# Altium PCB cmc.PcbDoc
Units mm, origin at the board's own origin, x right, y up, seen from the top; angles counter-clockwise.
Board outline 54 x 34 mm, 2 copper layers (Top Layer, Bottom Layer); 34 components, 37 nets, 160 pads, 37 vias.
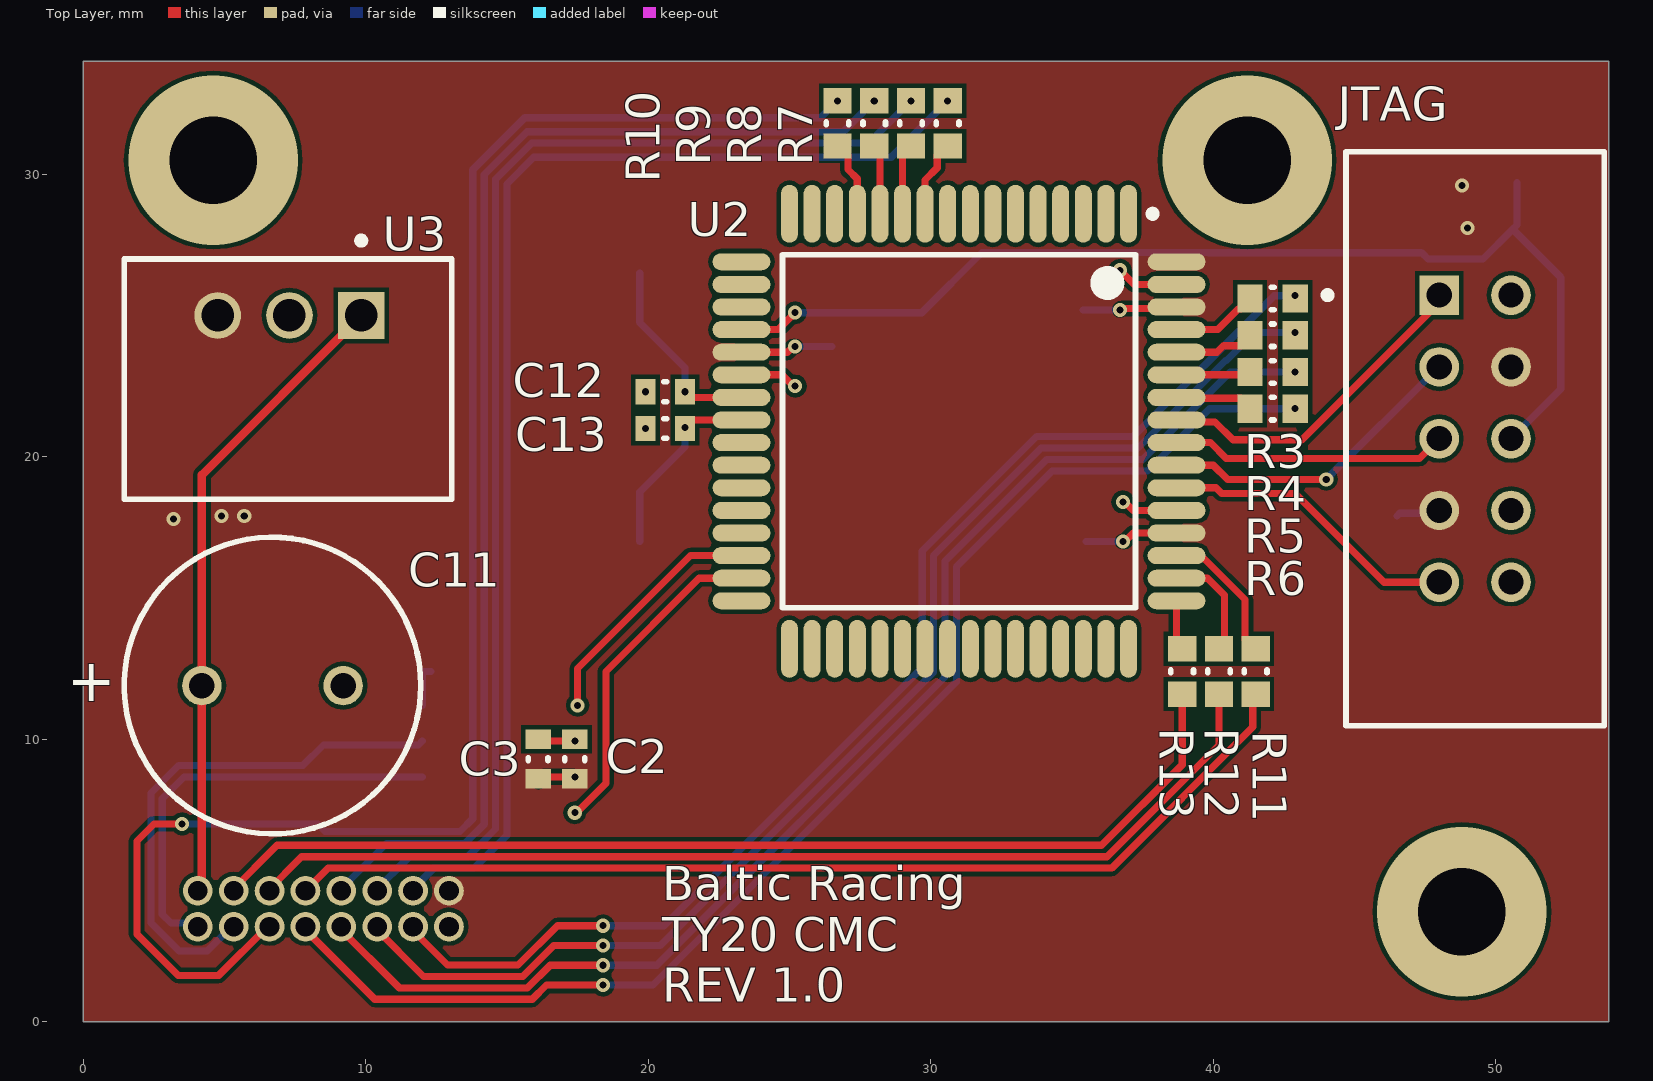
[diagram p0: Top Layer view]
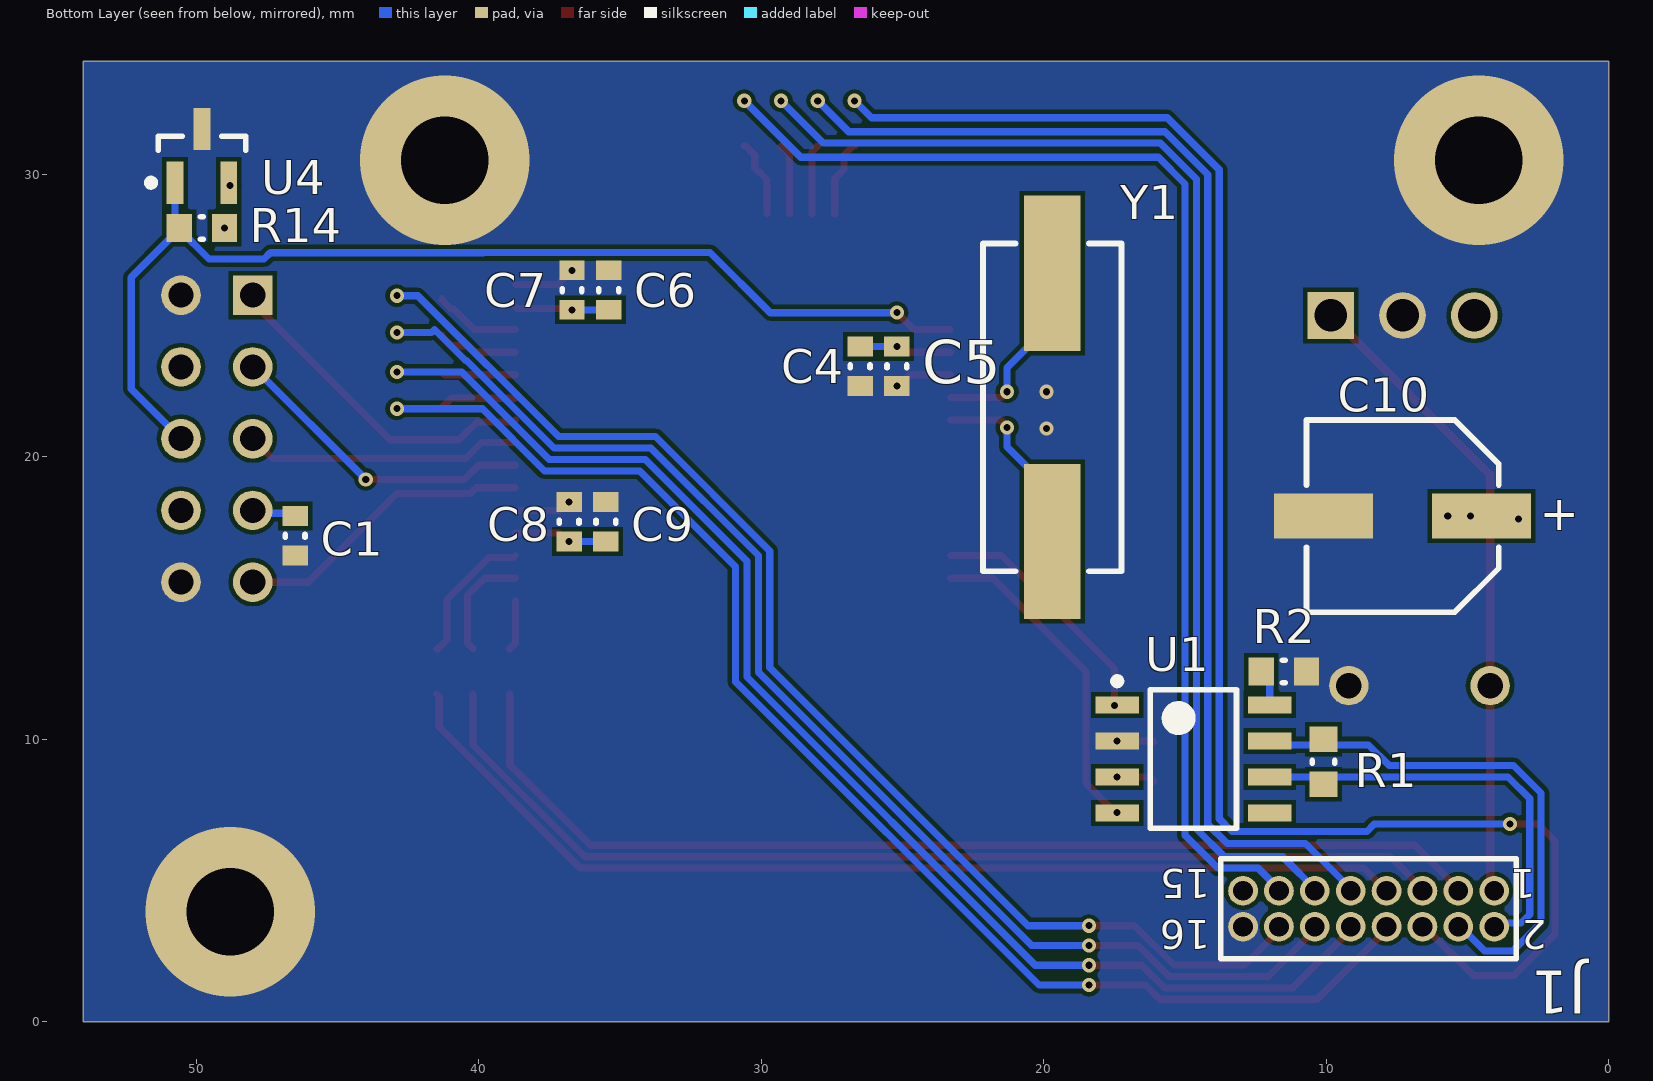
[diagram p1: Bottom Layer view, seen from below]

## Layer stack, top to bottom
Top Solder: solder mask 0.0102, Solder Resist, Dk 3.5
Top Layer: signal copper 0.0356
Dielectric 1: dielectric 0.32, FR-4, Dk 4.8
Bottom Layer: signal copper 0.0356
Bottom Solder: solder mask 0.0102, Solder Resist, Dk 3.5

## Board outline
0,0 0,34 54,34 54,0

## Design rules (kind name [scope] priority, off if disabled: settings)
Clearance [All] p1: gap=0.15 ignorepadtopadclearanceinfootprint=FALSE
PolygonConnect [All] p1: connectstyle=Direct reliefconductorwidth=0.254 reliefentries=4 polygonreliefangle="90 Angle" airgapwidth=0.254
RoutingVias [All] p1: holewidth=0.711 width=1.27 viastyle="Through Hole" minholewidth=0.711 minwidth=1.27 maxholewidth=0.711 maxwidth=1.27
SolderMaskExpansion [All] p1: expansion=0.102 istentingtop=FALSE
Width [All] p1: maxlimit=0.5 minlimit=0.254 preferedwidth=0.254
30 further rules are at their usual default settings.

## Components (designator, comment, footprint, x,y, rotation, side; value= is the part's Value field where it differs from the comment)
C1 "100nF 0603" CAPC0603(1608)100_L 46.5,17.2 r270 bottom value=100nF
C2 "100nF 0603" CAPC0603(1608)100_L 17.4,9.3 r90 top value=100nF
C3 "1µF 0603" CAPC0603(1608)100_L 16.1,9.3 r90 top value=100nF
C4 "100nF 0603" CAPC0603(1608)100_L 26.5,23.2 r90 bottom value=100nF
C5 "1µF 0603" CAPC0603(1608)100_L 25.2,23.2 r90 bottom value=100nF
C6 "100nF 0603" CAPC0603(1608)100_L 35.4,25.9 r270 bottom value=100nF
C7 "1µF 0603" CAPC0603(1608)100_L 36.7,25.9 r270 bottom value=100nF
C8 "100nF 0603" CAPC0603(1608)100_L 36.8,17.7 r270 bottom value=100nF
C9 "1µF 0603" CAPC0603(1608)100_L 35.5,17.7 r270 bottom value=100nF
C10 "100uF, 10V" WCAP-ASLU_6.3x7.7 7.3,17.9 r180 bottom
C11 "220uF, 25V" WCAP-ATET_10x12.5 6.7,11.9 r180 top
C12 "16 pF 0603" CAPC0603(1608)100_L 20.6,22.3 r180 top value=100nF
C13 "16 pF 0603" CAPC0603(1608)100_L 20.6,21 r180 top value=100nF
J1 "62201621121" 62201621121 8.5,4 r0 bottom
JTAG "5103309-1" TECO-5103309-1_V 49.27,20.64 r90 top (schematic designator P?)
R1 "127R 0603" RESC0603(1608)_N 10.1,9.2 r90 bottom value="127.00 Ohm"
R2 "10k 0603" RESC0603(1608)_N 11.5,12.4 r0 bottom value="127.00 Ohm"
R3 "10k 0603" RESC0603(1608)_N 42.1,25.6 r180 top value="127.00 Ohm"
R4 "10k 0603" RESC0603(1608)_N 42.1,24.3 r180 top value="127.00 Ohm"
R5 "10k 0603" RESC0603(1608)_N 42.1,23 r180 top value="127.00 Ohm"
R6 "10k 0603" RESC0603(1608)_N 42.1,21.7 r180 top value="127.00 Ohm"
R7 "10k 0603" RESC0603(1608)_N 30.6,31.8 r90 top value="127.00 Ohm"
R8 "10k 0603" RESC0603(1608)_N 29.3,31.8 r90 top value="127.00 Ohm"
R9 "10k 0603" RESC0603(1608)_N 28,31.8 r90 top value="127.00 Ohm"
R10 "10k 0603" RESC0603(1608)_N 26.7,31.8 r90 top value="127.00 Ohm"
R11 "10k 0603" RESC0603(1608)_N 41.5,12.4 r90 top value="127.00 Ohm"
R12 "10k 0603" RESC0603(1608)_N 40.2,12.4 r90 top value="127.00 Ohm"
R13 "10k 0603" RESC0603(1608)_N 38.9,12.4 r90 top value="127.00 Ohm"
R14 "10k 0603" RESC0603(1608)_N 49.8,28.1 r0 bottom value="127.00 Ohm"
U1 "MCP2551-I/SN" MCHP-SN8_V 14.7,9.3 r180 bottom
U2 "AT90CAN128-16AU" 64A_M 31,20.9 r270 top
U3 "R-78E5.0-0.5" REPO-R-78E-0.5-3_V 7.3,25 r180 top
U4 "MCP120T-300I/TT" SOT-23-TT3_N 49.8,30.65 r90 bottom
Y1 "16MHz, +/-30ppm, 16pF" WE-XTAL_HC49/4HSMX 19.7,21.75 r90 bottom

## Footprints (in the part's own frame and the unit in brackets; to place one, negate y for a bottom-side part, rotate by r counter-clockwise, add the part's x,y. Pads: shape width x height; smd on the part's side, far side on the other; paste and mask are expansions set on the pad)
64A_M [mm] "Thin QFP, 64-Leads, Body 14x14mm, Pitch 0.8mm, IPC Low Density"
  oval 2.05x0.6 smd: 1(-7.7,6) 2(-7.7,5.2) 3(-7.7,4.4) 4(-7.7,3.6) 5(-7.7,2.8) 6(-7.7,2) 7(-7.7,1.2) 8(-7.7,0.4) 9(-7.7,-0.4) 10(-7.7,-1.2) 11(-7.7,-2) 12(-7.7,-2.8) 13(-7.7,-3.6) 14(-7.7,-4.4) 15(-7.7,-5.2) 16(-7.7,-6) 33(7.7,-6) 34(7.7,-5.2) 35(7.7,-4.4) 36(7.7,-3.6) 37(7.7,-2.8) 38(7.7,-2) 39(7.7,-1.2) 40(7.7,-0.4) 41(7.7,0.4) 42(7.7,1.2) 43(7.7,2) 44(7.7,2.8) 45(7.7,3.6) 46(7.7,4.4) 47(7.7,5.2) 48(7.7,6)
  oval 0.6x2.05 smd: 17(-6,-7.7) 18(-5.2,-7.7) 19(-4.4,-7.7) 20(-3.6,-7.7) 21(-2.8,-7.7) 22(-2,-7.7) 23(-1.2,-7.7) 24(-0.4,-7.7) 25(0.4,-7.7) 26(1.2,-7.7) 27(2,-7.7) 28(2.8,-7.7) 29(3.6,-7.7) 30(4.4,-7.7) 31(5.2,-7.7) 32(6,-7.7) 49(6,7.7) 50(5.2,7.7) 51(4.4,7.7) 52(3.6,7.7) 53(2.8,7.7) 54(2,7.7) 55(1.2,7.7) 56(0.4,7.7) 57(-0.4,7.7) 58(-1.2,7.7) 59(-2,7.7) 60(-2.8,7.7) 61(-3.6,7.7) 62(-4.4,7.7) 63(-5.2,7.7) 64(-6,7.7)
  silkscreen extent -7.82,-6.25 6.25,6.98, body extent -7,-7 7,7, height 1.6
62201621121 [mm] "Pin Header, pitch 1.27 mm, THT, Vertical, dual row, 16p"
  round 1.05 hole 0.7: 1(-4.445,-0.635) 2(-4.445,0.635) 3(-3.175,-0.635) 4(-3.175,0.635) 5(-1.905,-0.635) 6(-1.905,0.635) 7(-0.635,-0.635) 8(-0.635,0.635) 9(0.635,-0.635) 10(0.635,0.635) 11(1.905,-0.635) 12(1.905,0.635) 13(3.175,-0.635) 14(3.175,0.635) 15(4.445,-0.635) 16(4.445,0.635)
  silkscreen extent -5.23,-1.78 5.23,1.77, body extent -5.08,-1.7 5.08,1.7, height 5.33
CAPC0603(1608)100_L [mm] "Chip Capacitor, Body 1.6x0.8mm, Height 1.0mm, IPC High Density"
  rect 0.7x0.9 smd: 1(-0.7,0) 2(0.7,0)
  silkscreen extent -0.05,-0.35 0.05,0.35, body extent -0.87,-0.47 0.88,0.48, height 1
MCHP-SN8_V [mm] "SOIC, 8-Leads, Body 4.9x3.9mm, Pitch 1.27mm"
  rect 1.55x0.6 smd: 1(-2.7,1.905) 2(-2.7,0.635) 3(-2.7,-0.635) 4(-2.7,-1.905) 5(2.7,-1.905) 6(2.7,-0.635) 7(2.7,0.635) 8(2.7,1.905)
  silkscreen extent -2.83,-2.45 1.53,2.88, body extent -3,-2.45 3,2.45, height 1.75
REPO-R-78E-0.5-3_V [mm] "THD, 3-Leads, Body 11.6x8.5mm, Pitch 2.54mm"
  rect 1.65x1.65 hole 1.15: 1(-2.54,0)
  round 1.65 hole 1.15: 2(0,0) 3(2.54,0)
  silkscreen extent -5.75,-2.77 5.85,6.5, body extent -5.75,-2 5.85,6.5, height 10.4
RESC0603(1608)_N [mm] "Chip Resistor, Body 1.6x0.8mm, IPC Medium Density"
  rect 0.9x1 smd: 1(-0.8,0) 2(0.8,0)
  silkscreen extent -0.05,-0.4 0.05,0.4, body extent -0.85,-0.47 0.85,0.47, height 0.6
SOT-23-TT3_N [mm] "SOT23, 3-Leads, Body 2.9x1.3mm, Pitch 0.95mm, Lead Span 2.4mm, IPC Medium Density"
  rect 1.5x0.6 smd: 1(-0.95,0.95) 2(-0.95,-0.95) 3(0.95,0)
  silkscreen extent -1.07,-1.55 0.7,1.93, body extent -0.7,-1.52 0.7,1.53, height 1.12
TECO-5103309-1_V [mm] "Male Header, 10-Leads, Body 20.32x9.144mm, Pitch 2.54mm"
  rect 1.4x1.4 hole 0.889: 1(5.08,1.27)
  round 1.4 hole 0.889: 2(5.08,-1.27) 3(2.54,1.27) 4(2.54,-1.27) 5(0,1.27) 6(0,-1.27) 7(-2.54,1.27) 8(-2.54,-1.27) 9(-5.08,1.27) 10(-5.08,-1.27)
  silkscreen extent -10.16,-4.57 10.16,5.35, body extent -10.16,-4.57 10.16,4.57, height 9.85
WCAP-ASLU_6.3x7.7 [mm] "Aluminum Electrolytic Capacitors, body diameter 6.3mm"
  rect 3.5x1.6 smd: 1(-2.8,0) 2(2.8,0)
  silkscreen extent -3.4,-3.4 3.4,3.4, body extent -3.65,-3.3 3.65,3.3, height 7.7
WCAP-ATET_10x12.5 [mm] "Aluminum Electrolytic Capacitors, 10x12.5mm"
  round 1.4 hole 0.9: 1(-2.5,0) 2(2.5,0)
  silkscreen extent -5.25,-5.25 5.25,5.25, body extent -4.99,-5 5,5, height 12.76
WE-XTAL_HC49/4HSMX [mm] "Quartz Crystal, size HC49/4HSMX, body 11.4x4.9mm"
  rect 5.5x2 smd: 1(-4.75,0) 2(4.75,0)
  silkscreen extent -5.8,-2.45 5.8,2.45, body extent -6.7,-2.45 6.7,2.45, height 4.3

## Part data
C1 C2 C3 C4 C5 C6 C7 C8 C9 C12 C13: library part CMP-1035-02579-1, "CAP 100nF 10V ±5% 0603 (1608 Metric) Thickness 1mm SMD", Case-EIA=0603, Case-Metric=1608, Rated Voltage="10 V", Tolerance=Â±5%, Max Thickness="1 mm", Technology=SMT
C10: library part 865090245005, "WCAP-ASLU Aluminium Electrolytic Capacitors, D6.3mm x L7.7mm, 100uF, +/-20%, 10VDC", Capacitance=100uF, Capacitance Tolerance=+/-20%, Leakage Current=2uA, Operating Temperature="-40 to +85degC", Rated Voltage=10VDC, Ripple Current max.=75mA, ComponentLink1Description=Manufacturer, ComponentLink1URL=http://www.we-online.de, ComponentLink2Description=Datasheet, ComponentLink2URL=https://katalog.we-online.com/pbs/datasheet/865090245005.pdf, Diameter=6.3mm, Dissipation Factor=22%, Endurance=1000h, Length=7.7mm, Mounting Technology=SMD, Packaging="Tape and Reel", Part Number=865090245005, Published Date="August 2019", Publisher="Wurth Elektronik", Technical Reference=ASBD077101M010DVCTCA000
C11: library part 860130475006, "WCAP-ATET THT Aluminum Electrolytic Capacitors, D10mm x L12.5mm, 220uF, +/-20%, 25VDC", Capacitance=220uF, Capacitance Tolerance=+/-20%, Leakage Current=55uA, Operating Temperature="-40 to +125degC", Rated Voltage=25VDC, Ripple Current max.=420mA, ComponentLink1Description=Manufacturer, ComponentLink1URL=http://www.we-online.de, ComponentLink2Description=Datasheet, ComponentLink2URL=https://katalog.we-online.com/pbs/datasheet/860130475006.pdf, Diameter=10mm, Dissipation Factor=13%, Endurance=2000h, Length=12.5mm, Mounting Technology=THT, Packaging="Ammo Pack", Part Number=860130475006, Published Date="August 2019", Publisher="Wurth Elektronik", Technical Reference=ATGF125221M025DSPA9B000
J1: library part CMP-1502-00950-1, "THT Vertical Pin Header WR-PHD, Pitch 1.27 mm, Dual Row, 16 pins", Contact Resistance=20mOhm, Manufacturer="Wurth Elektronik", Operating Temperature=-40to105degC, Rated Current=1A, Withstanding Voltage=500VAC, Working Voltage=100VAC, Datasheet URL=https://katalog.we-online.de/em/datasheet/62201621121.pdf, Gender=Male, Manufacturer URL=http://www.we-online.de, Mounting Technology=THT, Orientation=Vertical, Package Reference=62201621121, Packaging=Box, Part Number=62201621121, Pin Number=16, Pitch=1.27mm, Publisher=WurthElektronik, Row Number=Dual
JTAG: library part CMP-2000-07502-1, "Male Header, Pitch 2.54 mm, 2 x 5 Position, Height 9.855 mm, Tail Length 3.048 mm, -65 to 105 degC, RoHS, Tube", Colour=Black, Current Rating=1A, Flammability Rating=UL94V-0, Insulation Resistance=5GR, Manufacturer="TE Connectivity", Max Operating Temperature=105degC, Min Operating Temperature=-65degC, Package Description="Male Header, Pitch 2.54 mm, 2 x 5 Position, Height 9.855 mm, Tail Length 3.048 mm", Package Quantity=35, Board Standoff=Yes(With), Body Material=Thermoplastic, Connector System=Wire-to-Board, Connector Type=Header, Contact Gender=Male, Contact Material=CopperAlloy, Contact Mating Length=0.24inch, Contact Plating=Gold, Contact Shape=Square, Datasheet URL=http://www.te.com/commerce/DocumentDelivery/DDEController?Action=showdoc&DocId=Customer+Drawing%7F5103309%7FE1%7Fpdf%7FEnglish%7FENG_CD_5103309_E1.pdf%7F5103309-1, Datasheet Version="Rev. E1, 03/2011", Depth=9.14mm, ELV=Compliant, Gender=Male, Height=8.813mm, Housing Colour=Black, Housing Material=PBT, Lead Free=LeadFree, Length=0.8inch, Manufacturer URL=http://www.te.com/, Mating Alignment=Yes(With), Mating Connector Lock=No(Without), Mating Retention=No(Without), Max Current Rating=1A, Mount=ThroughHole, Mounting Technology=ThroughHole, Number of Contacts=10, Number of Positions=10, Number of Rows=2, Orientation=Straight, Package Reference=5103309-1, Packaging=Rail/Tube, Panel Mount Retention=No(Without), PCB Mount Alignment=No(Without), PCB Mounting Orientation=Vertical, PCB Mount Retention=Without, Pitch=2.54mm, REACH SVHC=NoSVHC, RoHSCompliant=True, Row Spacing=2.54mm, Shrouded=Yes(With), Shrouded End Dimension=3.81mm, Termination=ThroughHole, Termination Post Length=0.12inch
R1 R2 R3 R4 R5 R6 R7 R8 R9 R10 R11 R12 R13 R14: library part CMP-1012-00408-1, "127R 0.1W 1% 0603 (1608 Metric)  SMD", Case-EIA=0603, Case-Metric=1608, Power="0.1 W", Tolerance="1 %", Technology=SMT
U1: library part CMP-1721-00003-1, "High-Speed CAN Transceiver, /  1 Mb/s, 4.5 to 5.5 V, 8-Pin SOIC (SN), Industrial Temperature, RoHS, Tube", Manufacturer=Microchip, ComponentLink1Description="Manufacturer URL", ComponentLink1URL=http://www.microchip.com/, ComponentLink2Description=Datasheet, ComponentLink2URL=http://ww1.microchip.com/downloads/en/DeviceDoc/21667f.pdf, ComponentLink3Description="Package Specification", ComponentLink3URL=http://www.microchip.com/stellent/groups/techpub_sg/documents/packagingspec/en012702.pdf, DatasheetVersion="Rev. F, 07/2010", Mounting Technology="Surface Mount", PackageDescription="8-Pin Small Outline Integrated Circuit, Body 4.9 x 3.9 mm, Pitch 1.27 mm", PackageReference=SN8, RoHSCompliant=true
U2: library part CMP-0096-00104-1, "8-bit AVR Microcontroller, 128KB Flash and CAN Controller, 53 GPIO pins, Industrial Grade (-40° to +85°C), 64-pin LQFP, Green", Code_JEDEC=MS-026-AEB, DatasheetVersion="revH, Aug-2008", PackageDescription="64-Pin Plastic Thin Profile Quad Flat Pack, 14 x 14 x 1.0 mm Body, 0.8 mm Pitch (TQFP)", PackageReference=64A, PackageVersion="revB, Oct-2001"
U3: library part CMP-2000-06922-2, "DC/DC-Converter, 5 V Single Output, 500 mA, -40 to 85 degC, 3-Pin THD, RoHS, Tube", Current - Output (Max)=500mA, Manufacturer="Recom Power", Operating Temperature=-40°C~85°C, Package Description="3-Pin Through Hole Device, Body 11.6 x 8.5 mm, Pitch 2.54 mm", Package Reference="SIP Module", Package Version="Rev. 0", Datasheet URL=http://www.recom-power.com/pdf/Innoline/R-78Exx-0.5.pdf, Datasheet Version=01/2017, Efficiency=92%, Manufacturer URL=http://www.recom-power.com/us/americas/home.html, Mounting Technology=ThroughHole, Number of Outputs=1, Packaging=Tube, VIN Max=28V, VIN Min=7V, VOUT=5V
U4: library part CMP-0138-00362-1, "Microcontroller Supervisory Circuit with Open Drain Output, 3-Pin SOT-23, Industrial Temperature, Tape and Reel", Code_IPC=SOT23-3, DatasheetVersion="revD, 2001", PackageDescription="3-Lead Plastic Small Outline Transistor (TT) [SOT-23]", PackageReference=SOT-23-TT3, PackageVersion="revBB, Aug-2009"
Y1: library part 830003237, "WE-XTAL Quartz Crystal, size HC49-4HSMX, 16MHz, +/-30ppm, 16pF", Frequency=16MHz, Frequency Stability=50ppm, Frequency Tolerance=+/-30ppm, Load Capacitance=16pF, Operating Temperature="-10 up to +60degC", ComponentLink1Description=Manufacturer, ComponentLink1URL=http://www.we-online.de, ComponentLink2Description=Datasheet, ComponentLink2URL=https://katalog.we-online.com/pbs/datasheet/830003237.pdf, Mounting Technology=SMT, Packaging="Tape and Reel", Part Number=830003237, Published Date="March 2019", Publisher="Wurth Elektronik", Size=HC49-4HSMX

## Via types
v1: diameter 0.5, hole 0.25, Top Layer to Bottom Layer, 34 vias
v2: diameter 6, hole 3.1, Top Layer to Bottom Layer, 3 vias

## Nets (pads, with @x,y where several pads share a name; then routed paths per layer and width w, separated by ;. In a path a pad name is that pad's centre, name@x,y a point inside that pad or via, vN(x,y) a via of type N, cw(c..) or ccw(c..) an arc to the next point about the centre after c; other vN are vias at no path point)
12V: C11.2 J1.1 U3.1 | length 22.8
  Top Layer w0.254: J1.1@3.96,4.613 J1.1@4.2,4.852
  Top Layer w0.3: J1.1@4.2,4.852 C11.2 4.2,19.36 U3.1
Analog_in1: J1.14 R3.1 | length 44.1
  Top Layer w0.254: J1.14@11.58,3.343 11.58,3.32 12.892,2.008 15.394,2.008 16.786,3.4 v1(18.4,3.4)
  Bottom Layer w0.254: v1(18.4,3.4) 20.557,3.4 29.696,12.539 29.696,16.667 33.741,20.712 37.169,20.712 42.157,25.7 v1(42.9,25.7)
Analog_in2: J1.12 R4.1 | length 45.3
  Top Layer w0.254: J1.12@10.31,3.343 12.049,1.604 15.561,1.604 16.657,2.7 v1(18.4,2.7)
  Bottom Layer w0.254: v1(18.4,2.7) 20.429,2.7 30.1,12.371 30.1,16.5 33.908,20.308 37.337,20.308 40.433,23.404 40.471,23.404 41.567,24.5 41.667,24.4 v1(42.9,24.4)
Analog_in3: J1.10 R5.1 | length 46.2
  Top Layer w0.254: J1.10@9.04,3.343 11.183,1.2 15.729,1.2 16.529,2 v1(18.4,2)
  Bottom Layer w0.254: v1(18.4,2) 20.3,2 30.504,12.204 30.504,16.304 34.104,19.904 37.504,19.904 40.6,23 v1(42.9,23)
Analog_in4: J1.8 R6.1 | length 47.2
  Top Layer w0.254: J1.8@7.77,3.343 10.317,0.796 15.896,0.796 16.4,1.3 v1(18.4,1.3)
  Bottom Layer w0.254: v1(18.4,1.3) 20.171,1.3 30.908,12.037 30.908,16.108 34.3,19.5 37.671,19.5 39.871,21.7 v1(42.9,21.7)
CAN_H: J1.4 R1.2 U1.7 | length 18.6
  Bottom Layer w0.254: J1.4@5.23,3.343 4.387,2.5 3.4,2.5 2.396,3.504 2.396,8.096 3.369,9.069 7.769,9.069 8.5,9.8 10.1,9.8 11.865,9.8 U1.7
CAN_L: J1.2 R1.1 U1.6 | length 15
  Bottom Layer w0.254: J1.2@3.96,3.343 3.808,3.495 3.105,3.495 2.8,3.8 2.8,7.9 3.565,8.665 10.1,8.665 U1.6
CAN_RXD: U1.4 U2.31 | length 11.7
  Top Layer w0.254: v1(17.4,7.4) 17.457,7.4 18.5,8.443 18.5,12.4 21.8,15.7 U2.31
CAN_TXD: U1.1 U2.30 | length 8.8
  Top Layer w0.254: v1(17.5,11.2) 17.5,12.5 21.5,16.5 U2.30
Digital_1: J1.7 R11.1 | length 37.3
  Top Layer w0.254: J1.7@7.77,4.613 7.842,4.613 8.667,5.437 36.408,5.437 41.4,10.429 41.4,11.5 R11.1
Digital_2: J1.5 R12.1 | length 37.6
  Top Layer w0.254: J1.5@6.5,4.613 7.728,5.841 36.241,5.841 40.2,9.8 R12.1
Digital_3: J1.3 R13.1 | length 38
  Top Layer w0.254: J1.3@5.23,4.613 6.862,6.245 36.045,6.245 38.9,9.1 R13.1
Flatshift: J1.9 R9.2 | length 44
  Bottom Layer w0.254: J1.9@9.04,4.613 10.735,6.308 13.508,6.308 14.192,6.992 14.192,29.992 15.704,31.504 26.904,31.504 v1(28,32.6)
Gear_Sensor_Digital: J1.6 R10.2 | length 58.5
  Top Layer w0.254: v1(3.5,7) 2.5,7 1.9,6.4 1.9,3.1 3.357,1.643 4.8,1.643 J1.6@6.5,3.343
  Bottom Layer w0.254: v1(3.5,7) 8.301,7 8.563,6.739 13.339,6.739 13.788,7.188 13.788,30.159 15.629,32 26.1,32 v1(26.7,32.6)
GND: C1.2 C2.2 C3.2 C4.1 C5.1 C6.1 C7.1 C8.1 C9.1 C10.1 C11.1 C12.2 C13.2 J1.16 JTAG.2 JTAG.10 R2.1 U1.2 U2.22 U2.53 U2.63 U3.2 U4.3 | length 7.6
  Top Layer w0.254: C3.2@16.1,9.9 16.135,9.935 v1(17.4,9.935) ; U2.22 24.733,22.9 25.133,22.5 v1(25.2,22.5) ; v1(36.7,26.6) 37.2,26.1 U2.63 ; v1(36.8,18.4) 36.867,18.4 37.167,18.1 U2.53
  other v1: 19.9,21 19.9,22.3
  other v2: 48.8,3.9 4.6,30.5 41.2,30.5
JTAG_TCK: JTAG.1 U2.57 | length 11.9
  Top Layer w0.254: U2.57 38.766,21.234 40.066,21.234 40.7,20.6 43.142,20.6 45.446,22.904 47.621,25.079 47.621,25.341 JTAG.1
JTAG_TDI: JTAG.9 U2.54 | length 10.7
  Top Layer w0.254: U2.54 40.1,18.9 40.3,18.7 42.9,18.7 46.04,15.56 JTAG.9
JTAG_TDO: JTAG.3 U2.55 | length 11.2
  Top Layer w0.254: U2.55 40,19.7 40.5,19.2 v1(44,19.2)
  Bottom Layer w0.254: v1(44,19.2) 47.98,23.18 JTAG.3
JTAG_TMS: JTAG.5 U2.56 | length 9.8
  Top Layer w0.254: U2.56 39.9,20.5 40.461,19.939 47.299,19.939 JTAG.5
NetC12_1: C12.1 U2.23 Y1.2 | length 6.9
  Top Layer w0.254: v1(21.3,22.3) 21.5,22.1 U2.23
  Bottom Layer w0.254: Y1.2 19.7,24.75 21.3,23.15 v1(21.3,22.3)
NetC13_1: C13.1 U2.24 Y1.1 | length 6.9
  Top Layer w0.254: C13.1 v1(21.3,21.039) 21.3,21.077 21.523,21.3 U2.24
  Bottom Layer w0.254: Y1.1 19.7,18.75 21.3,20.35 v1(21.3,21.039)
NetR2_2: R2.2 U1.8 | length 1.5
  Bottom Layer w0.254: U1.8 12,12.4 R2.2
NetR3_2: R3.2 U2.61 | length 3.1
  Top Layer w0.254: U2.61 40.158,24.5 40.885,25.227 40.977,25.227 41.3,25.55 R3.2
NetR4_2: R4.2 U2.60 | length 2.9
  Top Layer w0.254: U2.60 40.134,23.7 40.361,23.927 40.977,23.927 41.3,24.25 R4.2
NetR5_2: R5.2 U2.59 | length 2.6
  Top Layer w0.254: U2.59 41.2,22.9 R5.2
NetR6_2: R6.2 U2.58 | length 2.8
  Top Layer w0.254: U2.58 38.727,22.073 40.977,22.073 41.3,21.75 R6.2
NetR7_1: R7.1 U2.10 | length 2.8
  Top Layer w0.254: U2.10 29.8,29.8 30.227,30.227 30.227,30.677 30.55,31 R7.1
NetR8_1: R8.1 U2.11 | length 2.5
  Top Layer w0.254: U2.11 29,30.7 R8.1
NetR9_1: R9.1 U2.12 | length 2.5
  Top Layer w0.254: R9.1 28.2,30.8 U2.12
NetR10_1: R10.1 U2.13 | length 2.7
  Top Layer w0.254: R10.1 26.75,31 27.073,30.677 27.073,30.169 27.4,29.842 U2.13
NetR11_2: R11.2 U2.51 | length 5
  Top Layer w0.254: U2.51 38.766,16.434 39.638,16.434 41.127,14.944 41.127,13.523 41.45,13.2 R11.2
NetR12_2: R12.2 U2.50 | length 3.9
  Top Layer w0.254: U2.50 39.8,15.7 40.4,15.1 40.4,13.4 R12.2
NetR13_2: R13.2 U2.49 | length 1.8
  Top Layer w0.254: U2.49 38.7,13.4 R13.2
RST: JTAG.6 R14.2 U2.20 U4.1 | length 39.5
  Top Layer w0.254: U2.20 24.598,24.5 v1(25.2,25.1) v1(25.2,25.1)
  Bottom Layer w0.254: v1(25.2,25.1) 29.683,25.1 31.81,27.227 39.839,27.227 39.843,27.223 47.377,27.223 47.6,27 49.55,27 R14.2@50.6,28.05 ; JTAG.6 52.3,22.4 52.3,26.35 R14.2@50.6,28.05 ; U4.1 50.75,28.2 R14.2@50.6,28.05
Servo_1: J1.13 R7.2 | length 44.1
  Bottom Layer w0.254: J1.13@11.58,4.613 12.404,5.437 13.837,5.437 15,6.6 15,29.657 15.943,30.6 28.6,30.6 v1(30.6,32.6)
Servo_2: J1.11 R8.2 | length 44.1
  Bottom Layer w0.254: J1.11@10.31,4.613 11.538,5.841 13.612,5.841 14.596,6.825 14.596,29.825 15.871,31.1 27.8,31.1 v1(29.3,32.6)
VDD: C1.1 C2.1 C3.1 C4.2 C5.2 C6.2 C7.2 C8.2 C9.2 C10.2 J1.15 JTAG.4 JTAG.7 R14.1 U1.3 U2.21 U2.52 U2.62 U2.64 U3.3 U4.2 | length 12.9
  Top Layer w0.254: C3.1@16.1,8.5 16.265,8.665 v1(17.4,8.665) ; U2.21 24.933,23.7 25.133,23.9 v1(25.2,23.9) ; v1(36.7,25.2) 36.747,25.247 38.647,25.247 U2.62 ; v1(36.8,17) 36.867,17 37.167,17.3 U2.52
  Bottom Layer w0.254: v1(25.2,23.9) C4.2 ; C6.2 v1(36.7,25.2) ; C9.2 v1(36.8,17) ; C1.1 46.6,18 47.9,18 JTAG.7
  other v1: 3.2,17.8 4.9,17.9 5.7,17.9 49,28.1 48.8,29.6
pads on no net: JTAG.8 U1.5 U2.1 U2.2 U2.3 U2.4 U2.5 U2.6 U2.7 U2.8 U2.9 U2.14 U2.15 U2.16 U2.17 U2.18 U2.19 U2.25 U2.26 U2.27 U2.28 U2.29 U2.32 U2.33 U2.34 U2.35 U2.36 U2.37 U2.38 U2.39 U2.40 U2.41 U2.42 U2.43 U2.44 U2.45 U2.46 U2.47 U2.48

## Polygon pours and split planes (outlines as drawn)
VDD on Top Layer "Top Layer-No Net" (solid, pour order 4): 0,0 0,34 54,34 54,0
GND on Bottom Layer "Top Layer-No Net1" (solid, pour order 5): 0,0 0,34 54,34 54,0

## Silkscreen, mask and mechanical layers (free items; w line width, h text height)
Top Overlay:
  text "Baltic Racing / TY20 CMC / REV 1.0" at 20.5,0.7 h1.2
BoardOutline:
  the board outline again, w0.254

## Text inside footprints (layer, text, board x,y; h text height)
C10: Bottom Overlay "+" at 2.45,17.4 h1.22
C11: Top Overlay "+" at 1.15,12.65 h1.5 r180
J1: Bottom Overlay "1" at 2.59,5.4 h1.02 r180; Bottom Overlay "2" at 2.19,3.6 h1.02 r180; Bottom Overlay "16" at 14.11,3.6 h1.02 r180; Bottom Overlay "15" at 14.11,5.4 h1.02 r180